# EAGLE board drive_pane (EAGLE 9.6.2), part 1 of 2
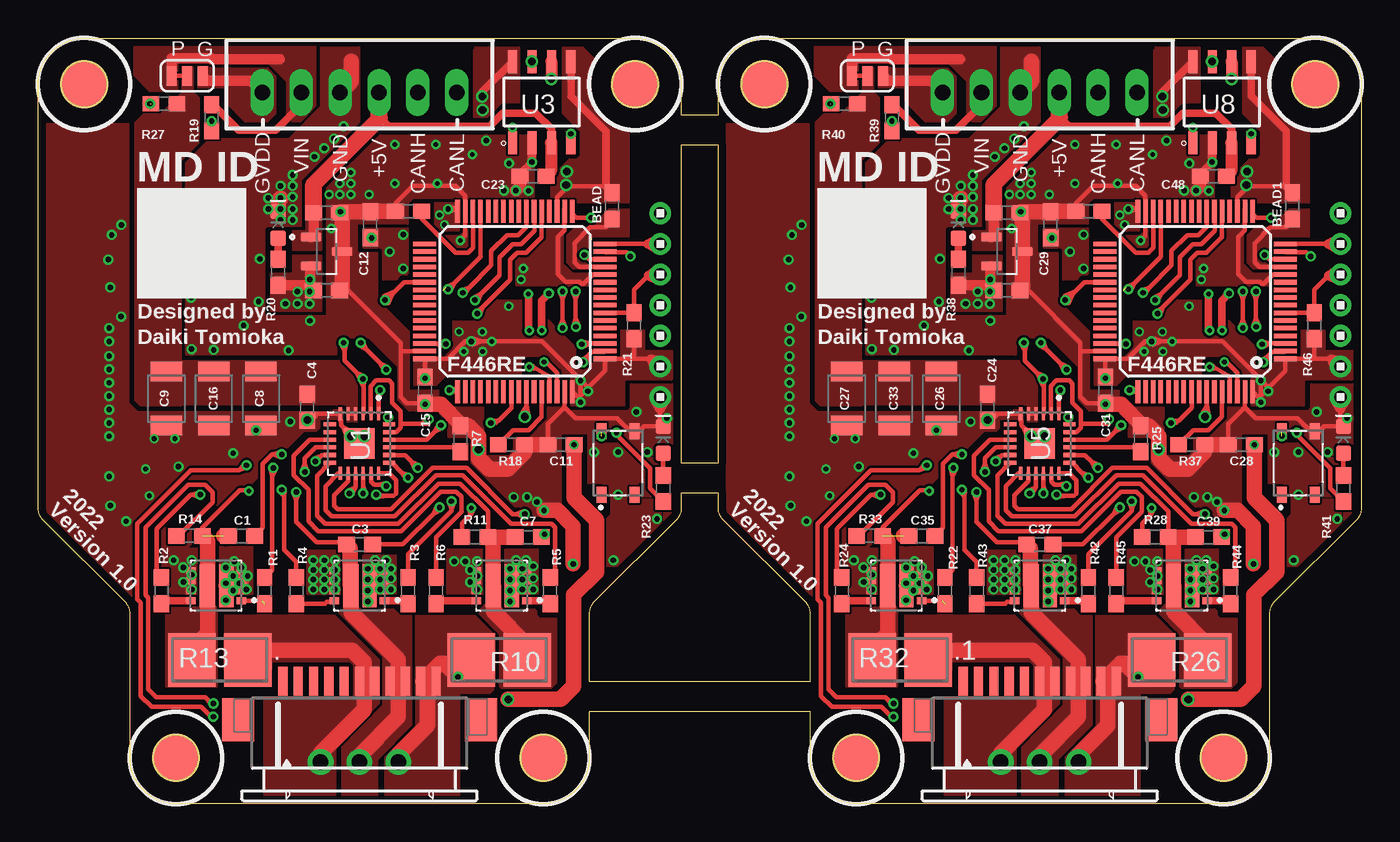
[diagram p0: board, top side]
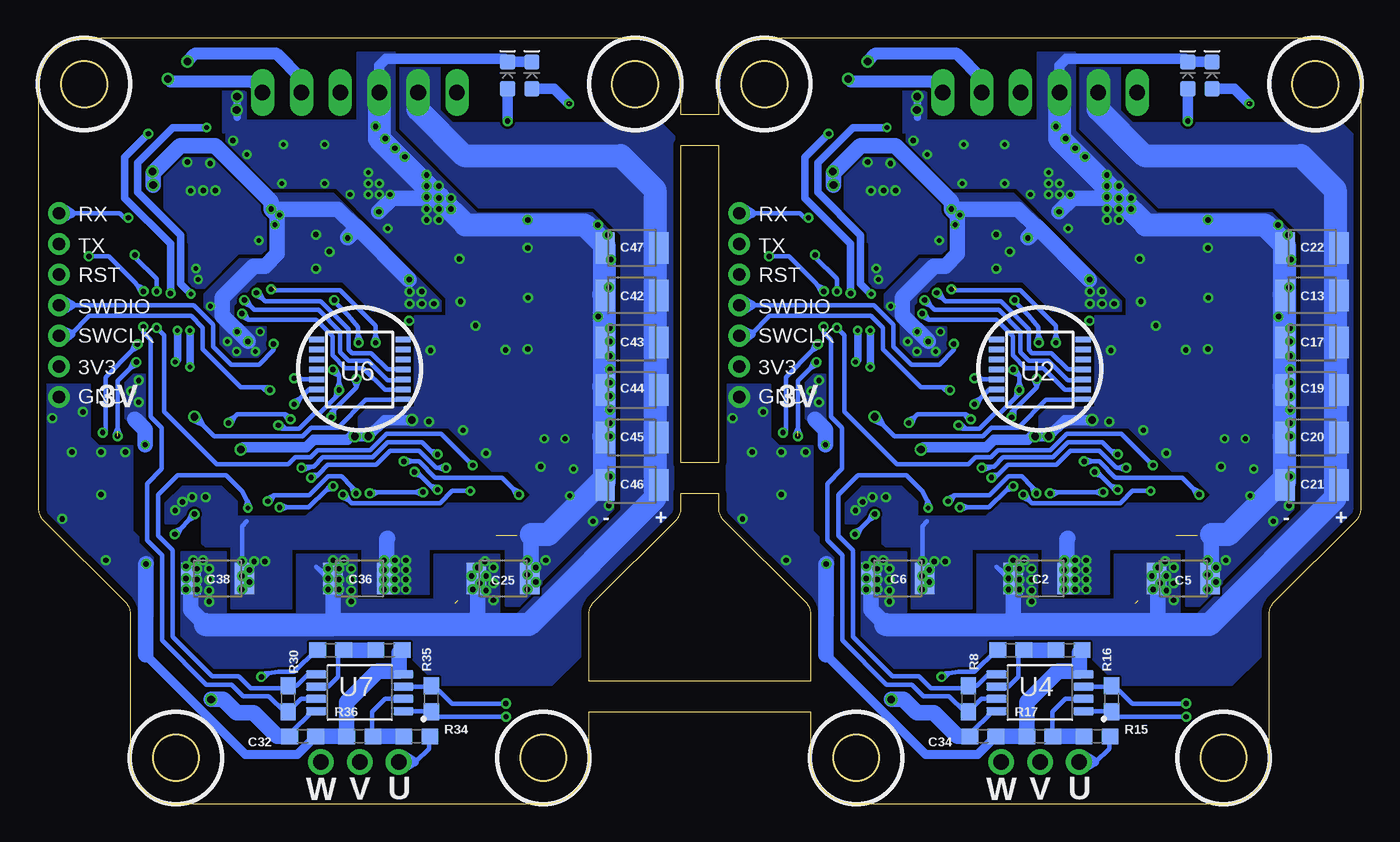
[diagram p1: board, bottom side, seen from below]

Size 86.45 x 50 mm. Coordinates in mm from the lower left corner, seen from the top.
Outline: 42,45 44.45,45 44.45,47 arc-90 47.45,50 83.45,50 arc-90 86.45,47 86.45,19.27 arc-45 86.16,18.56 80.74,13.15 arc45 80.45,12.44 80.45,3 arc-90 77.45,0 53.45,0 arc-90 50.45,3 50.45,6 36,6 36,3 arc-90 33,0 9,0 arc-90 6,3 6,12.44 arc45 5.71,13.15 0.29,18.56 arc-45 0,19.27 0,47 arc-90 3,50 39,50 arc-90 42,47 42,45
Outline: 42,22.27 44.45,22.27 44.45,43 42,43 42,22.27
Outline: 36,8 50.45,8 50.45,12.44 arc45 50.16,13.15 44.74,18.56 arc-45 44.45,19.27 44.45,20.27 42,20.27 42,19.27 arc-45 41.71,18.56 36.29,13.15 arc45 36,12.44 36,8
Outline: circle at 3,47 radius 1.5
Outline: circle at 39,47 radius 1.5
Outline: circle at 9,3 radius 1.5
Outline: circle at 33,3 radius 1.5
Outline: circle at 83.45,47 radius 1.5
Outline: circle at 53.45,3 radius 1.5
Outline: circle at 77.45,3 radius 1.5
Outline: circle at 47.45,47 radius 1.5
Copper layers (1*16): Top 0.035mm / dielectric 1.6mm / Bottom 0.035mm
Design rules "Elecrow_2-layer_PCB_eagle_rule": minimum track width 6mil, minimum drill 12mil, track to track 6mil, track to pad 6mil, pad to pad 6mil, via to via 8mil, smd to smd 0mil, copper to edge 20mil, drill to drill 10mil, minimum pad ring 6mil, minimum via ring 6mil, stop-mask expansion 0mil, vias tented up to drill 100mil, thermal gap 10mil
tRestrict: area 0,44 to 6,50; area 36,44 to 42,50; area 6,0 to 12,6; area 30,0 to 36,6; area 44.4,44 to 50.4,50; area 80.5,44 to 86.5,50; area 50.4,0 to 56.4,6; area 74.5,0 to 80.5,6; 20 lines
bRestrict: area 0,44 to 6,50; area 36,44 to 42,50; area 44.4,44 to 50.4,50; area 80.5,44 to 86.5,50; 2 lines

## Footprints (pad centres in the part's own frame; a part is rotated, then mirrored left to right if it is on the bottom)
CON-SMT-FFCFPC_52207-1185 = smd 0.6 x 1.9: 1 -5,2.5; 2 -4,2.5; 3 -3,2.5; 4 -2,2.5; 5 -1,2.5; 6 0,2.5; 7 1,2.5; 8 2,2.5; 9 3,2.5; 10 4,2.5; 11 5,2.5 | smd 2.1 x 2.8: P$1 -7.93,-0.03; P$4 7.945,-0.03
0603 = smd 1.1 x 1: 1 -0.85,0; 2 0.85,0
1210 = smd 1.27 x 2.06: 1 -1.755,0; 2 1.755,0
1608 = smd 1.1 x 1: 1 -0.85,0; 2 0.85,0
LED-0603 = smd 1 x 1: A -0.877,0; C 0.877,0
SMT-JUMPER_3_1-NC_TRACE_SILK = smd 0.635 x 1.27: 1 -1.016,0; 2 0,0; 3 1.016,0
1X03-CLEANBIG = drill 1.016 pad 1.676: 1 -2.54,0; 2 0,0; 3 2.54,0
STM32F446RET6 = smd 0.3 x 1.5: BOOT0 -1.75,5.9; PA3 -3.75,-5.9; PA4 -2.25,-5.9; PA5 -1.75,-5.9; PA6 -1.25,-5.9; PA7 -0.75,-5.9; PA14 3.75,5.9; PA15 3.25,5.9; PB0 0.75,-5.9; PB1 1.25,-5.9; PB2 1.75,-5.9; PB3 0.75,5.9; PB4 0.25,5.9; PB5 -0.25,5.9; PB6 -0.75,5.9; PB7 -1.25,5.9; PB8 -2.25,5.9; PB9 -2.75,5.9; PB10 2.25,-5.9; PC4 -0.25,-5.9; PC5 0.25,-5.9; PC10 2.75,5.9; PC11 2.25,5.9; PC12 1.75,5.9; PD2 1.25,5.9; VCAP_1 2.75,-5.9; VDD -2.75,-5.9; VDD1 3.75,-5.9; VDD3 -3.75,5.9; VSS -3.25,-5.9; VSS1 3.25,-5.9; VSS3 -3.25,5.9 | smd 1.5 x 0.3: NRST -5.9,0.75; PA0 -5.9,-2.75; PA1 -5.9,-3.25; PA2 -5.9,-3.75; PA8 5.9,0.25; PA9 5.9,0.75; PA10 5.9,1.25; PA11 5.9,1.75; PA12 5.9,2.25; PA13 5.9,2.75; PB12 5.9,-3.75; PB13 5.9,-3.25; PB14 5.9,-2.75; PB15 5.9,-2.25; PC0 -5.9,0.25; PC1 -5.9,-0.25; PC2 -5.9,-0.75; PC3 -5.9,-1.25; PC6 5.9,-1.75; PC7 5.9,-1.25; PC8 5.9,-0.75; PC9 5.9,-0.25; PC13 -5.9,3.25; PC14 -5.9,2.75; PC15 -5.9,2.25; PH0 -5.9,1.75; PH1 -5.9,1.25; VBAT -5.9,3.75; VDD2 5.9,3.75; VREF+ -5.9,-2.25; VREF- -5.9,-1.75; VSS2 5.9,3.25
TRANS_SIZ240DT-T1-GE3 = smd 0.62 x 0.44: 1 -1.64,0.975; 2 -1.64,0.325; 3 -1.64,-0.325; 4 -1.64,-0.975; 5 1.64,-0.975; 6 1.64,-0.325; 7 1.64,0.325; 8 1.64,0.975 | smd 1.005 x 2.8: 9 0.557,0 | smd 0.935 x 2.8: 10 -0.662,0
SMS-REF = smd 3.1 x 3.5: 1 1.829,0; 2 -1.829,0
R0603 = smd 1.1 x 1: 1 -0.85,0; 2 0.85,0
SOT95P237X112-3N = smd 1.32 x 0.59: 1 -1.015,0.95; 2 -1.015,-0.95; 3 1.015,0
SW_SKRPACE010 = smd 1.05 x 0.65: 1 -2.075,1.075; 2 2.075,1.075; 3 -2.075,-1.075; 4 2.075,-1.075
QFN50P400X400X100-25N = smd 0.27 x 0.86: BSTA 0.75,1.935; DT 0.25,1.935; GHA 1.25,1.935; GLA 0.75,-1.935; GLB 0.25,-1.935; GLC -0.25,-1.935; INHA -0.25,1.935; INHB -0.75,1.935; INHC -1.25,1.935; NC1 -1.25,-1.935; NC2 -0.75,-1.935; SHC 1.25,-1.935 | smd 0.86 x 0.27: BSTB 1.935,0.75; BSTC 1.935,-0.75; GHB 1.935,0.25; GHC 1.935,-1.25; GND -1.935,-1.25; GVDD -1.935,-0.25; INLA -1.935,1.25; INLB -1.935,0.75; INLC -1.935,0.25; MODE -1.935,-0.75; SHA 1.935,1.25; SHB 1.935,-0.25 | smd 2 x 2: PAD 0,0
SOP65P640X120-14N = smd 1 x 0.35: 1 -2.825,1.95; 2 -2.825,1.3; 3 -2.825,0.65; 4 -2.825,0; 5 -2.825,-0.65; 6 -2.825,-1.3; 7 -2.825,-1.95; 8 2.825,-1.95; 9 2.825,-1.3; 10 2.825,-0.65; 11 2.825,0; 12 2.825,0.65; 13 2.825,1.3; 14 2.825,1.95
SOIC127P600X175-8N = smd 1.5 x 0.6: 1 -2.65,1.905; 2 -2.65,0.635; 3 -2.65,-0.635; 4 -2.65,-1.905; 5 2.65,-1.905; 6 2.65,-0.635; 7 2.65,0.635; 8 2.65,1.905
SOP80P620X125-8N = smd 1.31 x 0.52: 1 -2.85,1.2; 2 -2.85,0.4; 3 -2.85,-0.4; 4 -2.85,-1.2; 5 2.85,-1.2; 6 2.85,-0.4; 7 2.85,0.4; 8 2.85,1.2
3MM = smd 3 x 3: P$1 0,0
1X7 = drill 0.8 pad 1.422: 1 -6,0; 2 -4,0; 3 -2,0; 4 0,0; 5 2,0; 6 4,0; 7 6,0
JST-XH-06-PACKAGE-LONG-PAD = drill 1.016 long: 1 -6.35,0; 2 -3.81,0; 3 -1.27,0; 4 1.27,0; 5 3.81,0; 6 6.35,0

## Placement (x,y rotation side)
.  FFC12_11PIN_1MM  [CON-SMT-FFCFPC_52207-1185]  20.99,5.51 0 top
.1  FFC12_11PIN_1MM  [CON-SMT-FFCFPC_52207-1185]  65.44,5.51 0 top
BEAD  0  [0603]  37.49,39.05 90 top
BEAD1  0  [0603]  81.94,39.05 90 top
C1  0.1uF  [0603]  13.29,17.49 180 top
C2  22UF-1210  [1210]  20.99,14.72 180 bottom
C3  0.1uF  [0603]  20.99,16.94 180 top
C4  0.1uF  [0603]  17.58,25.91 270 top
C5  22UF-1210  [1210]  11.62,14.72 180 bottom
C6  22UF-1210  [1210]  30.28,14.72 180 bottom
C7  0.1uF  [0603]  32.02,17.41 180 top
C8  22UF-1210  [1210]  14.56,26.46 90 top
C9  22UF-1210  [1210]  8.37,26.46 90 top
C10  0.1UF  [1608]  18.85,33.53 0 top
C11  0.1uF  [0603]  34.17,23.45 180 top
C12  0.1uF  [0603]  21.7,37.81 90 top
C13  22UF-1210  [1210]  3.21,33.21 0 bottom
C14  4.7uF  [0603]  24.2,38.7 180 top
C15  0.1uF  [0603]  25.28,27.02 270 top
C16  22UF-1210  [1210]  11.46,26.46 90 top
C17  22UF-1210  [1210]  3.21,30.11 0 bottom
C18  0.1UF  [1608]  18.85,38.61 0 top
C19  22UF-1210  [1210]  3.21,27.02 0 bottom
C20  22UF-1210  [1210]  3.21,23.92 0 bottom
C21  22UF-1210  [1210]  3.21,20.83 0 bottom
C22  22UF-1210  [1210]  3.21,36.31 0 bottom
C23  0.1uF  [0603]  32.34,40.99 180 top
C24  0.1uF  [0603]  62.03,25.91 270 top
C25  22UF-1210  [1210]  56.07,14.72 180 bottom
C26  22UF-1210  [1210]  59.01,26.46 90 top
C27  22UF-1210  [1210]  52.82,26.46 90 top
C28  0.1uF  [0603]  78.62,23.45 180 top
C29  0.1uF  [0603]  66.15,37.81 90 top
C30  4.7uF  [0603]  68.65,38.7 180 top
C31  0.1uF  [0603]  69.73,27.02 270 top
C32  0.1uF  [0603]  69.17,4.4 0 bottom
C33  22UF-1210  [1210]  55.91,26.46 90 top
C34  0.1uF  [0603]  24.72,4.4 0 bottom
C35  0.1uF  [0603]  57.74,17.49 180 top
C36  22UF-1210  [1210]  65.44,14.72 180 bottom
C37  0.1uF  [0603]  65.44,16.94 180 top
C38  22UF-1210  [1210]  74.73,14.72 180 bottom
C39  0.1uF  [0603]  76.47,17.41 180 top
C40  0.1UF  [1608]  63.3,38.61 0 top
C41  0.1UF  [1608]  63.3,33.53 0 top
C42  22UF-1210  [1210]  47.66,33.21 0 bottom
C43  22UF-1210  [1210]  47.66,30.11 0 bottom
C44  22UF-1210  [1210]  47.66,27.02 0 bottom
C45  22UF-1210  [1210]  47.66,23.92 0 bottom
C46  22UF-1210  [1210]  47.66,20.83 0 bottom
C47  22UF-1210  [1210]  47.66,36.31 0 bottom
C48  0.1uF  [0603]  76.79,40.99 180 top
D1  WHITE  [LED-0603]  11.33,47.58 90 bottom
D2  RED  [LED-0603]  9.75,47.58 90 bottom
D3  WHITE  [LED-0603]  15.67,37.81 90 top
D4  WHITE  [LED-0603]  55.78,47.58 90 bottom
D5  RED  [LED-0603]  54.2,47.58 90 bottom
D6  WHITE  [LED-0603]  40.83,23.77 90 top
D7  WHITE  [LED-0603]  85.28,23.77 90 top
D8  WHITE  [LED-0603]  60.12,37.81 90 top
JP1  JUMPER-SMT_3_1-NC_TRACE_SILK  [SMT-JUMPER_3_1-NC_TRACE_SILK]  54.18,47.54 180 top
JP2  JUMPER-SMT_3_1-NC_TRACE_SILK  [SMT-JUMPER_3_1-NC_TRACE_SILK]  9.73,47.54 180 top
JP3  [1X03-CLEANBIG]  20.99,2.73 0 top
JP4  [1X03-CLEANBIG]  65.44,2.73 0 top
NUCLEO_MAIN  F446RET6  [STM32F446RET6]  31.15,32.81 180 top
NUCLEO_MAIN1  F446RET6  [STM32F446RET6]  75.6,32.81 180 top
Q1  SIZ240DT-T1-GE3  [TRANS_SIZ240DT-T1-GE3]  56.07,14.24 180 top
Q2  SIZ240DT-T1-GE3  [TRANS_SIZ240DT-T1-GE3]  11.62,14.24 180 top
Q3  SIZ240DT-T1-GE3  [TRANS_SIZ240DT-T1-GE3]  20.99,14.24 180 top
Q4  SIZ240DT-T1-GE3  [TRANS_SIZ240DT-T1-GE3]  30.28,14.24 180 top
Q5  SIZ240DT-T1-GE3  [TRANS_SIZ240DT-T1-GE3]  65.44,14.24 180 top
Q6  SIZ240DT-T1-GE3  [TRANS_SIZ240DT-T1-GE3]  74.73,14.24 180 top
R1  50  [0603]  14.8,13.92 270 top
R2  50  [0603]  8.05,13.92 270 top
R3  50  [0603]  24.16,13.92 270 top
R4  50  [0603]  16.86,13.92 270 top
R5  50  [0603]  33.45,13.92 270 top
R6  50  [0603]  25.99,13.92 270 top
R7  50k  [0603]  27.58,23.84 270 top
R8  33k  [0603]  25.67,6.86 90 bottom
R9  33k  [0603]  19.08,10.03 180 bottom
R10  [SMS-REF]  30.12,9.4 180 top
R11  1k  [0603]  28.53,17.41 0 top
R12  1k  [0603]  22.89,10.03 180 bottom
R13  [SMS-REF]  11.86,9.4 0 top
R14  1k  [0603]  9.88,17.49 0 top
R15  1k  [0603]  17.26,4.4 0 bottom
R16  33k  [0603]  16.31,6.86 90 bottom
R17  33k  [0603]  20.99,4.4 0 bottom
R18  10k  [R0603]  30.91,23.45 180 top
R19  10k  [0603]  11.33,44.8 90 top
R20  1k  [R0603]  15.67,34.72 270 top
R21  10k  [R0603]  38.93,31.23 90 top
R22  50  [0603]  59.25,13.92 270 top
R23  1k  [0603]  40.83,20.59 270 top
R24  50  [0603]  52.5,13.92 270 top
R25  50k  [0603]  72.03,23.84 270 top
R26  [SMS-REF]  74.57,9.4 180 top
R27  8k  [0603]  8.21,45.72 0 top
R28  1k  [0603]  72.98,17.41 0 top
R29  1k  [0603]  67.34,10.03 180 bottom
R30  33k  [0603]  70.12,6.86 90 bottom
R31  33k  [0603]  63.54,10.03 180 bottom
R32  [SMS-REF]  56.31,9.4 0 top
R33  1k  [0603]  54.33,17.49 0 top
R34  1k  [0603]  61.71,4.4 0 bottom
R35  33k  [0603]  60.76,6.86 90 bottom
R36  33k  [0603]  65.44,4.4 0 bottom
R37  10k  [R0603]  75.36,23.45 180 top
R38  1k  [R0603]  60.12,34.72 270 top
R39  10k  [0603]  55.78,44.8 90 top
R40  8k  [0603]  52.66,45.72 0 top
R41  1k  [0603]  85.28,20.59 270 top
R42  50  [0603]  68.62,13.92 270 top
R43  50  [0603]  61.31,13.92 270 top
R44  50  [0603]  77.9,13.92 270 top
R45  50  [0603]  70.44,13.92 270 top
R46  10k  [R0603]  83.38,31.23 90 top
REG  AP7333  [SOT95P237X112-3N]  18.85,36.07 0 top
REG1  AP7333  [SOT95P237X112-3N]  63.3,36.07 0 top
S1  SKRPACE010  [SW_SKRPACE010]  37.9,22.26 90 top
S2  SKRPACE010  [SW_SKRPACE010]  82.35,22.26 90 top
U1  QFN50P400X400X100-25NDRV8300DRGER  [QFN50P400X400X100-25N]  20.99,23.53 270 top
U2  AS5048A-HTSP-500  [SOP65P640X120-14N]  20.99,28.37 180 bottom
U3  MCP2562-E/SN  [SOIC127P600X175-8N]  32.9,45.83 90 top
U4  SOP80P620X125-8N  [SOP80P620X125-8N]  20.99,7.26 180 bottom
U5  QFN50P400X400X100-25NDRV8300DRGER  [QFN50P400X400X100-25N]  65.44,23.53 270 top
U6  AS5048A-HTSP-500  [SOP65P640X120-14N]  65.44,28.37 180 bottom
U7  SOP80P620X125-8N  [SOP80P620X125-8N]  65.44,7.26 180 bottom
U8  MCP2562-E/SN  [SOIC127P600X175-8N]  77.35,45.83 90 top
U$1  PIN  [3MM]  39,47 0 top
U$2  1X7  [1X7]  40.64,32.57 90 top
U$3  PIN  [3MM]  3,47 0 top
U$4  PIN  [3MM]  9,3 0 top
U$5  PIN  [3MM]  33,3 0 top
U$6  1X7  [1X7]  85.09,32.57 90 top
U$7  PIN  [3MM]  83.45,47 0 top
U$8  PIN  [3MM]  47.45,47 0 top
U$9  PIN  [3MM]  53.45,3 0 top
U$10  PIN  [3MM]  77.45,3 0 top
X1  JST-XH-06-PIN-LONG-PAD  [JST-XH-06-PACKAGE-LONG-PAD]  65.44,46.47 0 top
X2  JST-XH-06-PIN-LONG-PAD  [JST-XH-06-PACKAGE-LONG-PAD]  20.99,46.47 0 top

## Library data of the parts
. .1 = MotorDriver_FourthEdition_prot
BEAD BEAD1 = SparkFun-Resistors; PROD_ID: RES-08609
C1 C3 C7 C35 C37 C39 = SparkFun-Capacitors; PROD_ID: CAP-08604
C2 C5 C6 C8 C9 C13 C16 C17 C19-C22 C25-C27 C33 C36 C38 C42-C47 = SparkFun-Capacitors
C4 C11 C12 C23 C24 C28 C29 C48 = SparkFun-Capacitors; PROD_ID: CAP-08390
C10 C18 C40 C41 = Custom_Designed_By_Yusei
C14 C15 C30-C32 C34 = SparkFun-Capacitors; PROD_ID: CAP-00810
D1 D3 D4 D6-D8 = SparkFun-LED; PROD_ID: DIO-09004
D2 D5 = SparkFun-LED; PROD_ID: DIO-00819
JP1 JP2 = SparkFun-Jumpers
JP3 JP4 = adafruit
NUCLEO_MAIN NUCLEO_MAIN1 = STM32F446RET6
Q1-Q6 = SIZ240DT-T1-GE3; AVAILABILITY: In Stock; DESCRIPTION: Mosfet Array 2 N-Channel (Dual) 40V 17.2A (Ta), 48A (Tc), 16.9A (Ta), 47A (Tc) 4.3W (Ta), 33W (Tc) Surface Mount 8-PowerPair® (3.3x3.3); MF: Vishay Siliconix; MP: SIZ240DT-T1-GE3; PACKAGE: PowerWDFN-8 Vishay Siliconix; PRICE: None; PURCHASE-URL: https://pricing.snapeda.com/search/part/SIZ240DT-T1-GE3/?ref=eda
R1-R9 R11 R12 R14-R17 R22 R24 R25 R28-R31 R33-R36 R42-R45 = SparkFun-Resistors; PROD_ID: RES-07856
R10 R13 R26 R32 = resistor-shunt; OC_FARNELL: unknown; OC_NEWARK: unknown
R18 R20 R21 R37 R38 R46 = Custom_Designed_By_Yusei; PROD_ID: RES-07856
R19 R23 R27 R39-R41 = SparkFun-Resistors; PROD_ID: RES-08296
REG REG1 = SOT95P237X112-3N
S1 S2 = Alps SW; AVAILABILITY: Good; DESCRIPTION: Switch Tactile N.O. SPST Button J-Bend 0.05A 16VDC 2.55N SMD Automotive T/R; MF: ALPS; MP: SKRPACE010; PACKAGE: None; PRICE: 0.29 USD
U1 U5 = DRV8300DRGER
U2 U6 = AS5048A-HTSP-500; AVAILABILITY: In Stock; DESCRIPTION: Hall Effect Sensor Angle External Magnet, Not Included Gull Wing; MF: ams; MP: AS5048A-HTSP-500; PACKAGE: TSSOP-14 ams; PRICE: None; PURCHASE-URL: https://pricing.snapeda.com/search/part/AS5048A-HTSP-500/?ref=eda
U3 U8 = MCP2562-E_SN; AVAILABILITY: In Stock; DESCRIPTION: 1/1 Transceiver Half CANbus 8-SOIC; MF: Microchip; MP: MCP2562-E/SN; PACKAGE: SO-8 Microchip; PRICE: None; PURCHASE-URL: https://pricing.snapeda.com/search/part/MCP2562-E/SN/?ref=eda
U4 U7 = NJM2732; A1_MIN: 0.0; A_MAX: 1.25; A_MIN: 1.25; A_NOM: 1.25; B_MAX: 0.35; B_MIN: 0.35; B_NOM: 0.35; D2_MAX: 0.0; D_MAX: 3.5; D_MIN: 3.5; D_NOM: 3.5; E1_MAX: 4.2; E1_MIN: 4.2; E1_NOM: 4.2; E2_MAX: 0.0; ENOM: 0.8; E_MAX: 6.2; E_MIN: 6.2; E_NOM: 6.2; L_MAX: 0.5; L_MIN: 0.5; L_NOM: 0.5; MANUFACTURER: New Japan Radio; PIN_COUNT: 8.0; SNAPEDA_PACKAGE_ID: 11524; STANDARD: IPC 7351B
U$1 U$3-U$5 U$7-U$10 = pin
U$2 U$6 = headers(2mm)
X1 X2 = Rembrandt Electronics - JST XH Connectors v1-0

## Nets
3V1: BEAD1.2 C28.1 C29.1 C31.1 C32.1 C41.1 NUCLEO_MAIN1.VBAT NUCLEO_MAIN1.VDD NUCLEO_MAIN1.VDD1 NUCLEO_MAIN1.VDD2 NUCLEO_MAIN1.VDD3 R38.2 R46.1 REG1.2 U6.12 U7.8 U8.5 U$6.2
3V3: BEAD.2 C10.1 C11.1 C12.1 C15.1 C34.1 NUCLEO_MAIN.VBAT NUCLEO_MAIN.VDD NUCLEO_MAIN.VDD1 NUCLEO_MAIN.VDD2 NUCLEO_MAIN.VDD3 R20.2 R21.1 REG.2 U2.12 U3.5 U4.8 U$2.2
5V: C18.1 C23.1 REG.1 U3.3 X2.4
5V1: C40.1 C48.1 REG1.1 U8.3 X1.4
BOOT0: NUCLEO_MAIN.BOOT0 R18.2
BOOT1: NUCLEO_MAIN1.BOOT0 R37.2
BSTA: C1.1 U1.BSTA
BSTA1: C35.1 U5.BSTA
BSTB: C3.1 U1.BSTB
BSTB1: C37.1 U5.BSTB
BSTC: C7.1 U1.BSTC
BSTC1: C39.1 U5.BSTC
C_U: NUCLEO_MAIN.PA0 R16.1 U4.1
C_U1: NUCLEO_MAIN1.PA0 R35.1 U7.1
C_W: NUCLEO_MAIN.PA1 R8.1 U4.7
C_W1: NUCLEO_MAIN1.PA1 R30.1 U7.7
CANH: U3.7 X2.5
CANH1: U8.7 X1.5
CANL: U3.6 X2.6
CANL1: U8.6 X1.6
CANRX: NUCLEO_MAIN.PB9 U3.4
CANRX1: NUCLEO_MAIN1.PB9 U8.4
CANTX: NUCLEO_MAIN.PB8 U3.1
CANTX1: NUCLEO_MAIN1.PB8 U8.1
CLK: NUCLEO_MAIN.PA5 U2.2
CLK1: NUCLEO_MAIN1.PA5 U6.2
CS: NUCLEO_MAIN.PB6 U2.1
CS1: NUCLEO_MAIN1.PB6 U6.1
DT: R7.2 U1.DT
DT1: R25.2 U5.DT
GHA: R1.1 U1.GHA
GHA1: R22.1 U5.GHA
GHB: R3.1 U1.GHB
GHB1: R42.1 U5.GHB
GHC: R5.1 U1.GHC
GHC1: R44.1 U5.GHC
GLA: R2.1 U1.GLA
GLA1: R24.1 U5.GLA
GLB: R4.1 U1.GLB
GLB1: R43.1 U5.GLB
GLC: R6.1 U1.GLC
GLC1: R45.1 U5.GLC
GND: C2.1 C4.2 C5.1 C6.1 C8.1 C9.1 C10.2 C11.2 C12.2 C13.1 C14.2 C15.2 C16.1 C17.1 C18.2 C19.1 C20.1 C21.1 C22.1 C23.2 C34.2 D1.C D2.C D3.C D6.C NUCLEO_MAIN.VREF- NUCLEO_MAIN.VSS NUCLEO_MAIN.VSS1 NUCLEO_MAIN.VSS2 NUCLEO_MAIN.VSS3 Q2.5 Q2.6 Q2.7 Q3.5 Q3.6 Q3.7 Q4.5 Q4.6 Q4.7 R7.1 R9.1 R17.1 R18.1 REG.3 S1.4 U1.GND U1.PAD U2.13 U3.2 U3.8 U4.4 U$2.1 X2.3
GND1: C24.2 C25.1 C26.1 C27.1 C28.2 C29.2 C30.2 C31.2 C32.2 C33.1 C36.1 C38.1 C40.2 C41.2 C42.1 C43.1 C44.1 C45.1 C46.1 C47.1 C48.2 D4.C D5.C D7.C D8.C NUCLEO_MAIN1.VREF- NUCLEO_MAIN1.VSS NUCLEO_MAIN1.VSS1 NUCLEO_MAIN1.VSS2 NUCLEO_MAIN1.VSS3 Q1.5 Q1.6 Q1.7 Q5.5 Q5.6 Q5.7 Q6.5 Q6.6 Q6.7 R25.1 R31.1 R36.1 R37.1 REG1.3 S2.4 U5.GND U5.PAD U6.13 U7.4 U8.2 U8.8 U$6.1 X1.3
GVDD: C4.1 C8.2 C9.2 C16.2 JP2.2 R27.2 U1.GVDD U1.MODE
GVDD1: C24.1 C26.2 C27.2 C33.2 JP1.2 R40.2 U5.GVDD U5.MODE
GVDD_IN: JP2.1 X2.1
GVDD_IN1: JP1.1 X1.1
HA: Q2.1 R1.2
HA1: Q1.1 R22.2
HB: Q3.1 R3.2
HB1: Q5.1 R42.2
HC: Q4.1 R5.2
HC1: Q6.1 R44.2
INA: NUCLEO_MAIN.PC7 U1.INHA U1.INLA
INA1: NUCLEO_MAIN1.PC7 U5.INHA U5.INLA
INB: NUCLEO_MAIN.PB4 U1.INHB U1.INLB
INB1: NUCLEO_MAIN1.PB4 U5.INHB U5.INLB
INC: NUCLEO_MAIN.PB10 U1.INHC U1.INLC
INC1: NUCLEO_MAIN1.PB10 U5.INHC U5.INLC
L: D3.A R20.1
L1: D8.A R38.1
LA: Q2.8 R2.2
LA1: Q1.8 R24.2
LB: Q3.8 R4.2
LB1: Q5.8 R43.2
LC: Q4.8 R6.2
LC1: Q6.8 R45.2
LED: NUCLEO_MAIN.PC14 R23.2
LED1: NUCLEO_MAIN1.PC14 R41.2
MISO: NUCLEO_MAIN.PA6 U2.3
MISO1: NUCLEO_MAIN1.PA6 U6.3
MOSI: NUCLEO_MAIN.PA7 U2.4
MOSI1: NUCLEO_MAIN1.PA7 U6.4
N$1: R28.1 R30.2 U7.5
N$2: R29.1 R31.2 U7.6
N$3: R33.1 R35.2 U7.3
N$4: R34.1 R36.2 U7.2
N$5: D4.A R39.1
N$6: D5.A R40.1
N$7: D7.A R41.1
N$8: R8.2 R11.1 U4.5
N$9: R9.2 R12.1 U4.6
N$10: R14.1 R16.2 U4.3
N$11: R15.1 R17.2 U4.2
N$14: D1.A R19.1
N$15: D2.A R27.1
N$21: D6.A R23.1
NRST: NUCLEO_MAIN.NRST R21.2 U$2.5
NRST1: NUCLEO_MAIN1.NRST R46.2 U$6.5
PVDD: C2.2 C5.2 C6.2 C13.2 C17.2 C19.2 C20.2 C21.2 C22.2 JP2.3 Q2.2 Q2.3 Q2.4 Q2.10 Q3.2 Q3.3 Q3.4 Q3.10 Q4.2 Q4.3 Q4.4 Q4.10 R19.2 X2.2
PVDD1: C25.2 C36.2 C38.2 C42.2 C43.2 C44.2 C45.2 C46.2 C47.2 JP1.3 Q1.2 Q1.3 Q1.4 Q1.10 Q5.2 Q5.3 Q5.4 Q5.10 Q6.2 Q6.3 Q6.4 Q6.10 R39.2 X1.2
SW: NUCLEO_MAIN.PC13 S1.2
SW1: NUCLEO_MAIN1.PC13 S2.2
SWCLK: NUCLEO_MAIN.PA14 U$2.3
SWCLK1: NUCLEO_MAIN1.PA14 U$6.3
SWDIO: NUCLEO_MAIN.PA13 U$2.4
SWDIO1: NUCLEO_MAIN1.PA13 U$6.4
U: C1.2 Q2.9 R13.2 R14.2 U1.SHA
U1: C35.2 Q1.9 R32.2 R33.2 U5.SHA
U_CS: ..6 ..7 JP3.1 R13.1 R15.2
U_CS1: .1.6 .1.7 JP4.1 R32.1 R34.2
USBRX: NUCLEO_MAIN.PA3 U$2.7
USBRX1: NUCLEO_MAIN1.PA3 U$6.7
USBTX: NUCLEO_MAIN.PA2 U$2.6
USBTX1: NUCLEO_MAIN1.PA2 U$6.6
V: ..8 ..9 C3.2 JP3.2 Q3.9 U1.SHB
V1: .1.8 .1.9 C37.2 JP4.2 Q5.9 U5.SHB
VCAP: C14.1 NUCLEO_MAIN.VCAP_1
VCAP1: C30.1 NUCLEO_MAIN1.VCAP_1
VDD5V: U2.11
VDD5V1: U6.11
VDDA: BEAD.1 NUCLEO_MAIN.VREF+
VDDA1: BEAD1.1 NUCLEO_MAIN1.VREF+
W: C7.2 Q4.9 R10.2 R11.2 U1.SHC
W1: C39.2 Q6.9 R26.2 R28.2 U5.SHC
W_CS: ..10 ..11 JP3.3 R10.1 R12.2
W_CS1: .1.10 .1.11 JP4.3 R26.1 R29.2

## Tracks (layer width: path | path; a pad name or v marks a point on that pad's centre or on a via)
3V1  (via drill 0.3, 0.35, 0.5)
  Top 0.3: 83.38,29.06 NUCLEO_MAIN1.VBAT 81.5,28.27 80.39,27.16 | 83.38,29.06 84.47,29.06 84.6,29.06 U$6.2 | R46.1 83.38,29.06 | NUCLEO_MAIN1.VDD1 71.85,38.85 71.76,38.85 | 71.76,38.85 v71.23,38.85 | 69.73,28.32 69.73,29.04 NUCLEO_MAIN1.VDD2 71.22,29.06 72.35,30.19 72.38,30.19 | 69.73,28.32 C31.1 | 79.85,26.62 80.39,27.16 | v72.74,30.19 73.43,30.19 | 73.43,30.19 v74.09,30.19 77.37,30.19 80,27.57 80.39,27.18 80.39,27.16 | 79.35,26.83 NUCLEO_MAIN1.VDD3 79.65,26.62 79.85,26.62 | 72.38,30.19 v72.74,30.19 | 66.35,37 C29.1 | 71.76,38.85 71.29,39.01 v71.23,38.85 | 71.76,38.85 71.29,38.68 v71.23,38.85 | 66.28,36.9 66.23,36.91 v66.23,36.96 66.15,36.88 66.15,36.65 66.15,36.64 | 69.73,28.32 69.56,27.85 v69.73,27.79 69.89,27.85 69.73,28.32 | 73.43,30.19 72.82,30.41 v72.74,30.19 | 73.43,30.19 72.82,29.98 v72.74,30.19 | 72.38,30.19 72.7,30.08 v72.74,30.19 | 72.38,30.19 72.7,30.31 v72.74,30.19 | v79.89,27.65 79.89,26.62 79.85,26.62 | NUCLEO_MAIN1.VDD 78.35,39.61 79.06,40.32 81.52,40.32
  Top 0.5: U8.5 79.25,46.23 81.55,43.93 81.55,40.29 | 81.52,40.32 81.55,40.29 | 81.55,40.29 BEAD1.2
  Top 0.6: 84.47,29.06 84.71,28.42 U$6.2 85.15,28.97 84.47,29.06
  Top 0.7: REG1.2 62.2,35.04 v62.2,34.24 62.2,33.77 C41.1 62.11,33.87 R38.2
  Top 1: v75.16,6.81 78.57,6.81 79.44,7.68 79.44,13.64 80.92,15.11 80.92,18.53 79.47,19.98 C28.1
  Bottom 0.3: U7.8 68.52,6.05 70.02,4.56 C32.1 | v71.23,38.85 71.21,38.87 | U6.12 69.21,27.72 | 69.21,27.72 69.66,27.72 v69.73,27.79 | 66.6,37 v66.23,36.96 | v66.23,36.96 66.28,37.13 | v66.23,36.96 66.31,36.8 | 69.21,27.72 69.69,27.62 v69.73,27.79 | 69.21,27.72 69.64,27.95 v69.73,27.79
  Bottom 1: C32.1 70.84,4.4 72.38,5.94 73.49,5.94 74.36,6.81 v75.16,6.81 | v62.2,34.24 65.69,37.73 65.69,37.65 | 65.69,37.65 66.89,38.85 v71.23,38.85 | v71.23,38.85 71.23,39.32 74.89,42.97 77.19,42.97 78.94,41.22 v78.94,40.41 | v71.23,38.85 70.84,38.45 70.84,35.91 71.62,35.12 72.37,35.12 74.44,33.06 74.44,31.89 v72.74,30.19 | v66.23,36.96 65.69,37.51 65.69,37.65 | C28.1 79.47,24.43 80.15,25.12
  other vias: 79.47,23.45 79.89,26.23 80.36,26.94 70.68,38.45 71,37.81 71.95,30.83 73.46,30.83 62.19,33.45 62.19,32.66 61.39,32.66 60.6,32.66 61.39,33.45 72.27,29.54 73.49,29.54 75.2,32.5 68.3,34.96 68.3,37.18 67.42,36.07 79,41.3
  pour Top (no thermals): 79.25,27.65 79.57,27.65 80.6,28.69 80.76,28.84 80.76,29.16 82.74,29.16 82.74,25.99 79.25,25.99
  pour Bottom (no thermals): 79.49,28.05 80.2,28.05 80.76,27.5 80.76,25.27 80.76,25.19 80.05,24.48 79.49,24.48 79.41,24.56 79.41,27.97
  pour Top (no thermals): 70.36,39.24 71.95,39.24 71.95,37.42 70.84,37.42 70.36,37.89
  pour Top (no thermals): 69.01,29.16 69.01,27.34 70.44,27.34 71.16,28.05 76,28.05 76,28.92 76.31,29.24 77.66,29.24 78.7,28.21 78.7,28.13 78.85,27.97 79.17,27.97 79.25,27.89 79.25,27.1 80.68,27.1 80.68,28.37 79.81,28.37 79.57,28.61 79.57,29.8 76.47,32.89 71.55,32.89 71.55,29.72 71,29.16
  pour Bottom (no thermals): 60.12,32.81 60.12,32.18 64.65,32.18 66.55,34.08 72.19,34.08 73.7,32.58 73.7,31.78 73.06,31.15 71.55,31.15 71.55,29.72 72.11,29.16 73.7,29.16 74.57,30.04 74.57,31.38 75.6,32.42 75.6,33.29 73.3,35.59 71.47,35.59 71.23,35.83 71.23,39.88 67.19,39.88
  pour Top (no thermals): 61.07,35.83 62.98,35.83 62.98,32.18 59.65,32.18 59.65,34.64 61.07,34.64
  pour Top (no thermals): 85.84,29.56 85.84,27.73 82.59,27.73 82.59,30.91 84.01,30.91 84.01,29.56
  pour Top (no thermals): 68.62,37.58 65.68,37.58 65.68,36.31 66.87,36.31 66.95,36.23 66.95,34.24 67.82,34.24 68.14,34.56 68.54,34.56 68.62,34.64
  pour Top (no thermals): 79.97,49.48 78.7,49.48 78.7,45.12 79.89,43.93 79.89,42.34 79.65,42.1 79.17,42.1 77.96,40.88 77.96,39.63 79.65,39.63 79.65,39.24 83.06,39.24 83.06,46.39
3V3  (via drill 0.3, 0.35, 0.5)
  Top 0.3: 38.93,29.06 NUCLEO_MAIN.VBAT 37.05,28.27 35.93,27.16 | 38.93,29.06 40.02,29.06 40.15,29.06 U$2.2 | R21.1 38.93,29.06 | NUCLEO_MAIN.VDD1 27.4,38.85 27.31,38.85 | 27.31,38.85 v26.78,38.85 | 25.28,28.32 25.28,29.04 NUCLEO_MAIN.VDD2 26.76,29.06 27.9,30.19 27.93,30.19 | 25.28,28.32 C15.1 | 35.4,26.62 35.93,27.16 | v28.29,30.19 28.98,30.19 | 28.98,30.19 v29.64,30.19 32.92,30.19 35.55,27.57 35.93,27.18 35.93,27.16 | 34.9,26.83 NUCLEO_MAIN.VDD3 35.2,26.62 35.4,26.62 | 27.93,30.19 v28.29,30.19 | 21.9,37 C12.1 | 27.31,38.85 26.84,39.01 v26.78,38.85 | 27.31,38.85 26.84,38.68 v26.78,38.85 | 21.83,36.9 21.78,36.91 v21.78,36.96 21.7,36.88 21.7,36.65 21.7,36.64 | 25.28,28.32 25.11,27.85 v25.28,27.79 25.44,27.85 25.28,28.32 | 28.98,30.19 28.37,30.41 v28.29,30.19 | 28.98,30.19 28.37,29.98 v28.29,30.19 | 27.93,30.19 28.25,30.08 v28.29,30.19 | 27.93,30.19 28.25,30.31 v28.29,30.19 | v35.44,27.65 35.44,26.62 35.4,26.62 | NUCLEO_MAIN.VDD 33.9,39.61 34.61,40.32 37.07,40.32
  Top 0.5: U3.5 34.8,46.23 37.1,43.93 37.1,40.29 | 37.07,40.32 37.1,40.29 | 37.1,40.29 BEAD.2
  Top 0.6: 40.02,29.06 40.26,28.42 U$2.2 40.7,28.97 40.02,29.06
  Top 0.7: REG.2 17.75,35.04 v17.75,34.24 17.75,33.77 C10.1 17.66,33.87 R20.2
  Top 1: v30.7,6.81 34.12,6.81 34.99,7.68 34.99,13.64 36.47,15.11 36.47,18.53 35.02,19.98 C11.1
  Bottom 0.3: U4.8 24.07,6.05 25.57,4.56 C34.1 | v26.78,38.85 26.76,38.87 | U2.12 24.76,27.72 | 24.76,27.72 25.2,27.72 v25.28,27.79 | 22.15,37 v21.78,36.96 | v21.78,36.96 21.83,37.13 | v21.78,36.96 21.85,36.8 | 24.76,27.72 25.24,27.62 v25.28,27.79 | 24.76,27.72 25.19,27.95 v25.28,27.79
  Bottom 1: C34.1 26.39,4.4 27.93,5.94 29.04,5.94 29.91,6.81 v30.7,6.81 | v17.75,34.24 21.24,37.73 21.24,37.65 | 21.24,37.65 22.44,38.85 v26.78,38.85 | v26.78,38.85 26.78,39.32 30.44,42.97 32.74,42.97 34.49,41.22 v34.49,40.41 | v26.78,38.85 26.39,38.45 26.39,35.91 27.17,35.12 27.92,35.12 29.99,33.06 29.99,31.89 v28.29,30.19 | v21.78,36.96 21.24,37.51 21.24,37.65 | C11.1 35.02,24.43 35.7,25.12
  other vias: 35.02,23.45 35.44,26.23 35.91,26.94 26.23,38.45 26.55,37.81 27.5,30.83 29.01,30.83 17.74,33.45 17.74,32.66 16.94,32.66 16.15,32.66 16.94,33.45 27.82,29.54 29.04,29.54 30.75,32.5 23.85,34.96 23.85,37.18 22.97,36.07 34.55,41.3
  pour Top (no thermals): 34.8,27.65 35.12,27.65 36.15,28.69 36.31,28.84 36.31,29.16 38.29,29.16 38.29,25.99 34.8,25.99
  pour Bottom (no thermals): 35.04,28.05 35.75,28.05 36.31,27.5 36.31,25.27 36.31,25.19 35.59,24.48 35.04,24.48 34.96,24.56 34.96,27.97
  pour Top (no thermals): 25.91,39.24 27.5,39.24 27.5,37.42 26.39,37.42 25.91,37.89
  pour Top (no thermals): 24.56,29.16 24.56,27.34 25.99,27.34 26.7,28.05 31.55,28.05 31.55,28.92 31.86,29.24 33.21,29.24 34.25,28.21 34.25,28.13 34.4,27.97 34.72,27.97 34.8,27.89 34.8,27.1 36.23,27.1 36.23,28.37 35.36,28.37 35.12,28.61 35.12,29.8 32.02,32.89 27.1,32.89 27.1,29.72 26.55,29.16
  pour Bottom (no thermals): 15.67,32.81 15.67,32.18 20.2,32.18 22.1,34.08 27.74,34.08 29.24,32.58 29.24,31.78 28.61,31.15 27.1,31.15 27.1,29.72 27.66,29.16 29.24,29.16 30.12,30.04 30.12,31.38 31.15,32.42 31.15,33.29 28.85,35.59 27.02,35.59 26.78,35.83 26.78,39.88 22.74,39.88
  pour Top (no thermals): 16.62,35.83 18.53,35.83 18.53,32.18 15.2,32.18 15.2,34.64 16.62,34.64
  pour Top (no thermals): 41.39,29.56 41.39,27.73 38.13,27.73 38.13,30.91 39.56,30.91 39.56,29.56
  pour Top (no thermals): 24.16,37.58 21.23,37.58 21.23,36.31 22.42,36.31 22.5,36.23 22.5,34.24 23.37,34.24 23.69,34.56 24.09,34.56 24.16,34.64
  pour Top (no thermals): 35.52,49.48 34.25,49.48 34.25,45.12 35.44,43.93 35.44,42.34 35.2,42.1 34.72,42.1 33.51,40.88 33.51,39.63 35.2,39.63 35.2,39.24 38.61,39.24 38.61,46.39
5V
  Top 0.5: 22.26,44.88 22.34,44.8 22.89,44.25 29.49,44.25 30.36,45.12 32.5,45.12 33.53,44.09 U3.3
  Top 0.7: C18.1 18,37.18 REG.1
  Top 0.8: C23.1 33.51,41.31 33.51,43.16 U3.3
  Top 1: 18,40.45 22.34,44.8
  Top 1.1: C18.1 18,40.45 | 22.26,44.88 X2.4
  pour Top (no thermals): 17.5,38.29 18.53,38.29 18.53,36.15 16.62,36.15 16.62,37.42 17.5,37.42
5V1
  Top 0.5: 66.71,44.88 66.79,44.8 67.34,44.25 73.94,44.25 74.81,45.12 76.95,45.12 77.98,44.09 U8.3
  Top 0.7: C40.1 62.45,37.18 REG1.1
  Top 0.8: C48.1 77.96,41.31 77.96,43.16 U8.3
  Top 1: 62.45,40.45 66.79,44.8
  Top 1.1: C40.1 62.45,40.45 | 66.71,44.88 X1.4
  pour Top (no thermals): 61.95,38.29 62.98,38.29 62.98,36.15 61.07,36.15 61.07,37.42 61.95,37.42
BOOT0
  Top 0.3: R18.2 31.01,24.4 32.02,24.4 32.9,25.28 NUCLEO_MAIN.BOOT0
BOOT1
  Top 0.3: R37.2 75.46,24.4 76.47,24.4 77.35,25.28 NUCLEO_MAIN1.BOOT0
BSTA  (via drill 0.35)
  Top 0.3: U1.BSTA 23.96,22.78 24.43,22.3 | v24.8,21.93 24.43,22.3 | v15.91,22.81 15.38,22.81 | 15.38,22.81 15.28,22.81 14.66,22.2 14.66,18.02 C1.1 | 24.43,22.3 24.64,21.86 v24.8,21.93 | 24.43,22.3 24.88,22.09 v24.8,21.93 | 15.38,22.81 15.85,22.65 v15.91,22.81 | 15.38,22.81 15.85,22.98 v15.91,22.81
  Bottom 0.3: v15.91,22.81 16.13,22.81 16.38,23.06 | 16.38,23.06 16.92,23.6 19.16,23.6 20.15,22.62 23.41,22.62 24.01,22.02 24.5,22.02 | 24.27,21.94 24.64,21.94 24.64,21.93 v24.8,21.93 | 24.27,21.94 24.74,21.77 v24.8,21.93 | 24.27,21.94 24.5,22.02 | 24.5,22.02 24.74,22.1 v24.8,21.93 | 16.38,23.06 15.88,22.99 v15.91,22.81 | 16.38,23.06 16.04,22.69 v15.91,22.81
BSTA1  (via drill 0.35)
  Top 0.3: U5.BSTA 68.41,22.78 68.88,22.3 | v69.25,21.93 68.88,22.3 | v60.36,22.81 59.84,22.81 | 59.84,22.81 59.73,22.81 59.11,22.2 59.11,18.02 C35.1 | 68.88,22.3 69.09,21.86 v69.25,21.93 | 68.88,22.3 69.33,22.09 v69.25,21.93 | 59.84,22.81 60.3,22.65 v60.36,22.81 | 59.84,22.81 60.3,22.98 v60.36,22.81
  Bottom 0.3: v60.36,22.81 60.58,22.81 60.82,23.06 | 60.82,23.06 61.37,23.6 63.61,23.6 64.6,22.62 67.86,22.62 68.46,22.02 68.96,22.02 | 68.73,21.94 69.09,21.94 69.09,21.93 v69.25,21.93 | 68.73,21.94 69.19,21.77 v69.25,21.93 | 68.73,21.94 68.96,22.02 | 68.96,22.02 69.19,22.1 v69.25,21.93 | 60.82,23.06 60.34,22.99 v60.36,22.81 | 60.82,23.06 60.49,22.69 v60.36,22.81
BSTB  (via drill 0.35)
  Top 0.3: U1.BSTB 21.74,21.03 21.94,20.83 22.22,20.83 | v22.74,20.75 22.66,20.83 22.22,20.83 | C3.1 23.81,16.94 25.86,18.99 | v26.23,19.36 25.86,18.99 | 22.38,20.86 22.7,20.69 v22.74,20.75 | 22.22,20.83 22.38,20.86 | 22.38,20.86 22.7,20.92 v22.74,20.75 | 25.86,18.99 26.3,19.2 v26.23,19.36 | 25.86,18.99 26.07,19.43 v26.23,19.36
  Bottom 0.3: v22.74,20.75 22.93,20.75 23.19,20.49 | v26.23,19.36 25.7,19.36 | 25.7,19.36 24.32,19.36 23.19,20.49 | 23.19,20.49 22.87,20.86 v22.74,20.75 | 23.19,20.49 22.71,20.57 v22.74,20.75 | 25.7,19.36 26.17,19.19 v26.23,19.36 | 25.7,19.36 26.17,19.53 v26.23,19.36
BSTB1  (via drill 0.35)
  Top 0.3: U5.BSTB 66.19,21.03 66.39,20.83 66.67,20.83 | v67.19,20.75 67.11,20.83 66.67,20.83 | C37.1 68.26,16.94 70.31,18.99 | v70.68,19.36 70.31,18.99 | 66.83,20.86 67.15,20.69 v67.19,20.75 | 66.67,20.83 66.83,20.86 | 66.83,20.86 67.15,20.92 v67.19,20.75 | 70.31,18.99 70.75,19.2 v70.68,19.36 | 70.31,18.99 70.52,19.43 v70.68,19.36
  Bottom 0.3: v67.19,20.75 67.38,20.75 67.64,20.49 | v70.68,19.36 70.15,19.36 | 70.15,19.36 68.77,19.36 67.64,20.49 | 67.64,20.49 67.32,20.86 v67.19,20.75 | 67.64,20.49 67.16,20.57 v67.19,20.75 | 70.15,19.36 70.62,19.19 v70.68,19.36 | 70.15,19.36 70.62,19.53 v70.68,19.36
BSTC  (via drill 0.35)
  Top 0.3: U1.BSTC 20.24,21.07 19.32,20.15 19.32,19.48 19.56,19.24 23.05,19.24 25.75,21.94 27.97,21.94 30.99,18.92 31.26,18.92 | 31.26,18.92 v31.78,18.92 | C7.1 32.9,17.48 v33.08,17.61 | 31.26,18.92 31.73,18.76 v31.78,18.92 | 31.26,18.92 31.73,19.09 v31.78,18.92
  Bottom 0.3: 32.14,18.54 31.88,18.8 31.88,18.82 v31.78,18.92 | 32.14,18.54 32.71,17.98 | 32.71,17.98 v33.08,17.61 | 32.14,18.54 31.95,18.99 v31.78,18.92 | 32.14,18.54 31.7,18.77 v31.78,18.92 | 32.71,17.98 32.92,17.53 v33.08,17.61 | 32.71,17.98 33.16,17.77 v33.08,17.61
BSTC1  (via drill 0.35)
  Top 0.3: U5.BSTC 64.69,21.07 63.77,20.15 63.77,19.48 64.01,19.24 67.5,19.24 70.2,21.94 72.43,21.94 75.44,18.92 75.71,18.92 | 75.71,18.92 v76.23,18.92 | C39.1 77.35,17.48 v77.53,17.61 | 75.71,18.92 76.18,18.76 v76.23,18.92 | 75.71,18.92 76.18,19.09 v76.23,18.92
  Bottom 0.3: 76.59,18.54 76.34,18.8 76.34,18.82 v76.23,18.92 | 76.59,18.54 77.16,17.98 | 77.16,17.98 v77.53,17.61 | 76.59,18.54 76.4,18.99 v76.23,18.92 | 76.59,18.54 76.15,18.77 v76.23,18.92 | 77.16,17.98 77.37,17.53 v77.53,17.61 | 77.16,17.98 77.61,17.77 v77.53,17.61
C_U  (via drill 0.35)
  Top 0.3: v34.26,33.46 34.26,32.94 | 34.26,32.94 34.26,31.61 | 34.26,31.61 v34.26,31.08 | v13.61,22.11 13.45,22.11 13.17,21.82 | 13.17,21.82 13.12,21.78 9.96,21.78 6.46,18.29 6.46,13.37 6.7,13.13 6.7,7.02 7.4,6.32 10.65,6.32 11.29,5.68 v11.44,5.68 | v11.44,5.68 11.38,5.52 | v11.44,5.68 11.38,5.85 | 13.17,21.82 13.65,21.93 v13.61,22.11 | 13.17,21.82 13.47,22.21 v13.61,22.11 | 34.26,31.61 34.09,31.14 v34.26,31.08 | 34.26,31.61 34.42,31.14 v34.26,31.08 | 34.26,32.94 34.42,33.4 v34.26,33.46 | 34.26,32.94 34.09,33.4 v34.26,33.46 | v35.68,35.85 35.7,35.85 35.98,35.56 NUCLEO_MAIN.PA0
  Bottom 0.3: U4.1 16.35,6.05 R16.1 15.98,5.68 v11.44,5.68 | v13.61,22.11 15.67,24.16 19.24,24.16 20.31,23.09 23.73,23.09 24.19,22.63 25.22,22.63 25.67,22.18 30.36,22.18 33.77,25.59 33.77,30.59 v34.26,31.08 | v34.26,33.46 34.26,34.28 35.68,35.7 v35.68,35.85 | v11.44,5.68 11.4,5.86 | v11.44,5.68 11.57,5.57
C_U1  (via drill 0.35)
  Top 0.3: v78.71,33.46 78.71,32.94 | 78.71,32.94 78.71,31.61 | 78.71,31.61 v78.71,31.08 | v58.06,22.11 57.9,22.11 57.62,21.82 | 57.62,21.82 57.57,21.78 54.41,21.78 50.91,18.29 50.91,13.37 51.15,13.13 51.15,7.02 51.85,6.32 55.1,6.32 55.74,5.68 v55.88,5.68 | v55.88,5.68 55.82,5.52 | v55.88,5.68 55.82,5.85 | 57.62,21.82 58.1,21.93 v58.06,22.11 | 57.62,21.82 57.92,22.21 v58.06,22.11 | 78.71,31.61 78.54,31.14 v78.71,31.08 | 78.71,31.61 78.87,31.14 v78.71,31.08 | 78.71,32.94 78.87,33.4 v78.71,33.46 | 78.71,32.94 78.54,33.4 v78.71,33.46 | v80.13,35.85 80.15,35.85 80.43,35.56 NUCLEO_MAIN1.PA0
  Bottom 0.3: U7.1 60.8,6.05 R35.1 60.43,5.68 v55.88,5.68 | v58.06,22.11 60.12,24.16 63.69,24.16 64.77,23.09 68.18,23.09 68.64,22.63 69.67,22.63 70.12,22.18 74.81,22.18 78.22,25.59 78.22,30.59 v78.71,31.08 | v78.71,33.46 78.71,34.28 80.13,35.7 v80.13,35.85 | v55.88,5.68 55.85,5.86 | v55.88,5.68 56.02,5.57
C_W  (via drill 0.35)
  Top 0.3: v35.13,31.16 35.12,31.17 35.12,31.69 | v35.12,33.46 35.12,32.94 | 35.12,32.94 35.12,31.69 | 35.12,32.94 35.28,33.4 v35.12,33.46 | 35.12,32.94 34.95,33.4 v35.12,33.46 | 35.12,31.69 34.96,31.22 v35.13,31.16 | 35.12,31.69 35.3,31.23 v35.13,31.16 | NUCLEO_MAIN.PA1 37.1,36.02 38.42,36.02 v38.69,35.75
  Bottom 0.3: U4.7 24.83,6.86 R8.1 25.91,6.01 26.93,7.03 28.61,7.03 29.36,7.78 31.02,7.78 33.91,10.67 33.91,16.22 34.88,17.2 34.88,20.91 33.92,21.87 33.92,24.55 34.64,25.27 34.64,30.3 35.13,30.79 v35.13,31.16 | v35.12,33.46 35.49,33.83 | 35.49,33.83 35.49,33.84 35.71,34.06 37.41,35.75 v38.69,35.75 | 35.49,33.83 35.04,33.62 v35.12,33.46 | 35.49,33.83 35.28,33.39 v35.12,33.46
C_W1  (via drill 0.35)
  Top 0.3: v79.58,31.16 79.57,31.17 79.57,31.69 | v79.57,33.46 79.57,32.94 | 79.57,32.94 79.57,31.69 | 79.57,32.94 79.73,33.4 v79.57,33.46 | 79.57,32.94 79.4,33.4 v79.57,33.46 | 79.57,31.69 79.41,31.22 v79.58,31.16 | 79.57,31.69 79.75,31.23 v79.58,31.16 | NUCLEO_MAIN1.PA1 81.55,36.02 82.88,36.02 v83.14,35.75
  Bottom 0.3: U7.7 69.28,6.86 R30.1 70.36,6.01 71.38,7.03 73.06,7.03 73.81,7.78 75.47,7.78 78.36,10.67 78.36,16.22 79.33,17.2 79.33,20.91 78.37,21.87 78.37,24.55 79.09,25.27 79.09,30.3 79.58,30.79 v79.58,31.16 | v79.57,33.46 79.94,33.83 | 79.94,33.83 79.94,33.84 80.16,34.06 81.86,35.75 v83.14,35.75 | 79.94,33.83 79.49,33.62 v79.57,33.46 | 79.94,33.83 79.73,33.39 v79.57,33.46
CANH  (via drill 0.5)
  Bottom 0.8: U3.7 31.73,49.01 26.47,49.01 24.8,47.34 X2.5
  other vias: 32.26,48.48
CANH1  (via drill 0.5)
  Bottom 0.8: U8.7 76.18,49.01 70.92,49.01 69.25,47.34 X1.5
  other vias: 76.71,48.48
CANL  (via drill 0.5)
  Top 0.8: U3.6 v33.53,47.34
  Bottom 0.8: v33.53,47.34 33.38,47.18 28.06,47.18 X2.6
CANL1  (via drill 0.5)
  Top 0.8: U8.6 v77.98,47.34
  Bottom 0.8: v77.98,47.34 77.83,47.18 72.51,47.18 X1.6
CANRX  (via drill 0.3, 0.35)
  Top 0.3: NUCLEO_MAIN.PB9 33.9,28.16 33.21,28.84 v33.05,28.84
  Top 0.5: v32.9,30.91 32.9,32.87 v33.36,33.34
  Top 0.6: U3.4 v34.8,43.77
  Bottom 0.5: v34.8,43.77 36.35,42.22 36.35,39.56 33.36,36.58 v33.36,33.34 | v33.05,28.84 32.9,29 v32.9,30.91
CANRX1  (via drill 0.3, 0.35)
  Top 0.3: NUCLEO_MAIN1.PB9 78.35,28.16 77.66,28.84 v77.51,28.84
  Top 0.5: v77.35,30.91 77.35,32.87 v77.81,33.34
  Top 0.6: U8.4 v79.25,43.77
  Bottom 0.5: v79.25,43.77 80.8,42.22 80.8,39.56 77.81,36.58 v77.81,33.34 | v77.51,28.84 77.35,29 v77.35,30.91
CANTX  (via drill 0.3)
  Top 0.3: NUCLEO_MAIN.PB8 33.4,27.86 33.31,27.96 32.34,28.53 32.18,28.53 | v32.08,28.53 32.26,28.53 32.38,28.41 | 30.99,43.71 v30.99,44.16 30.85,44.11 30.99,43.71 | 30.99,43.71 U3.1 | 32.38,28.41 32.3,28.61 v32.08,28.53 | 32.38,28.41 32.18,28.53 | 32.18,28.53 32.11,28.57 v32.08,28.53 | 30.99,43.71 31.14,44.11
  Top 0.5: v32.02,33.29 32.02,30.97 v32.08,30.91
  Bottom 0.5: v30.99,44.16 33.21,44.16 35.52,41.86 35.52,39.94 32.71,37.14 32.71,33.98 v32.02,33.29 | v32.08,30.91 v32.08,28.53
CANTX1  (via drill 0.3)
  Top 0.3: NUCLEO_MAIN1.PB8 77.85,27.86 77.76,27.96 76.79,28.53 76.63,28.53 | v76.53,28.53 76.71,28.53 76.83,28.41 | 75.44,43.71 v75.44,44.16 75.3,44.11 75.44,43.71 | 75.44,43.71 U8.1 | 76.83,28.41 76.76,28.61 v76.53,28.53 | 76.83,28.41 76.63,28.53 | 76.63,28.53 76.56,28.57 v76.53,28.53 | 75.44,43.71 75.59,44.11
  Top 0.5: v76.47,33.29 76.47,30.97 v76.53,30.91
  Bottom 0.5: v75.44,44.16 77.66,44.16 79.97,41.86 79.97,39.94 77.16,37.14 77.16,33.98 v76.47,33.29 | v76.53,30.91 v76.53,28.53
CLK  (via drill 0.35)
  Top 0.3: v28.69,32.02 28.69,32.08 29.03,32.42 | 29.03,32.42 30.84,34.23 30.84,35.52 31.3,35.98 31.87,35.98 32.9,37.01 NUCLEO_MAIN.PA5 | 29.03,32.42 28.6,32.17 v28.69,32.02 | 29.03,32.42 28.86,31.96 v28.69,32.02
  Bottom 0.3: U2.2 18.19,27.04 19.35,27.04 20.76,28.45 21.94,28.45 22.78,29.28 22.78,30.55 23.85,31.62 28.29,31.62 28.32,31.65 | v28.69,32.02 28.32,31.65 | 28.32,31.65 28.76,31.86 v28.69,32.02 | 28.32,31.65 28.53,32.1 v28.69,32.02
CLK1  (via drill 0.35)
  Top 0.3: v73.14,32.02 73.14,32.08 73.48,32.42 | 73.48,32.42 75.29,34.23 75.29,35.52 75.75,35.98 76.32,35.98 77.35,37.01 NUCLEO_MAIN1.PA5 | 73.48,32.42 73.05,32.17 v73.14,32.02 | 73.48,32.42 73.31,31.96 v73.14,32.02
  Bottom 0.3: U6.2 62.64,27.04 63.8,27.04 65.21,28.45 66.39,28.45 67.23,29.28 67.23,30.55 68.3,31.62 72.74,31.62 72.77,31.65 | v73.14,32.02 72.77,31.65 | 72.77,31.65 73.22,31.86 v73.14,32.02 | 72.77,31.65 72.98,32.1 v73.14,32.02
CS  (via drill 0.5)
  Top 0.3: NUCLEO_MAIN.PB6 31.9,26.01 | 31.9,26.01 31.9,25.39 v31.78,25.27 | 31.9,26.01 31.56,25.39 v31.78,25.27 | 31.9,26.01 32.03,25.32 v31.78,25.27
  Bottom 0.3: U2.1 18.2,26.38 20.59,26.38 22.42,24.56 24.16,24.56 24.72,24 30.51,24 31.25,24.74 | 31.25,24.74 v31.78,25.27 | 31.25,24.74 31.89,25.05 v31.78,25.27 | 31.25,24.74 31.56,25.38 v31.78,25.27
CS1  (via drill 0.5)
  Top 0.3: NUCLEO_MAIN1.PB6 76.35,26.01 | 76.35,26.01 76.35,25.39 v76.23,25.27 | 76.35,26.01 76.01,25.39 v76.23,25.27 | 76.35,26.01 76.48,25.32 v76.23,25.27
  Bottom 0.3: U6.1 62.65,26.38 65.04,26.38 66.87,24.56 68.62,24.56 69.17,24 74.97,24 75.71,24.74 | 75.71,24.74 v76.23,25.27 | 75.71,24.74 76.34,25.05 v76.23,25.27 | 75.71,24.74 76.01,25.38 v76.23,25.27
DT
  Top 0.3: R7.2 27.3,23.28 U1.DT
DT1
  Top 0.3: R25.2 71.75,23.28 U5.DT
GHA  (via drill 0.35)
  Top 0.3: R1.1 15.28,15.25 15.28,21.42 | v15.35,21.94 15.28,21.86 15.28,21.42 | v24.16,21.3 24.09,21.3 23.76,21.63 | 23.76,21.63 23.11,22.28 U1.GHA | 15.28,21.42 15.51,21.86 v15.35,21.94 | 15.28,21.42 15.18,21.91 v15.35,21.94 | 23.76,21.63 24.01,21.21 v24.16,21.3 | 23.76,21.63 24.22,21.47 v24.16,21.3
  Bottom 0.3: v24.16,21.3 23.93,21.3 23.69,21.54 | 23.69,21.54 23.09,22.14 19.92,22.14 19.01,23.05 17.1,23.05 15.99,21.94 15.88,21.94 | 15.88,21.94 v15.35,21.94 | 15.88,21.94 15.41,22.11 v15.35,21.94 | 15.88,21.94 15.41,21.77 v15.35,21.94 | 23.69,21.54 24.04,21.18 v24.16,21.3 | 23.69,21.54 24.18,21.48 v24.16,21.3
GHA1  (via drill 0.35)
  Top 0.3: R22.1 59.73,15.25 59.73,21.42 | v59.8,21.94 59.73,21.86 59.73,21.42 | v68.62,21.3 68.54,21.3 68.21,21.63 | 68.21,21.63 67.56,22.28 U5.GHA | 59.73,21.42 59.96,21.86 v59.8,21.94 | 59.73,21.42 59.63,21.91 v59.8,21.94 | 68.21,21.63 68.46,21.21 v68.62,21.3 | 68.21,21.63 68.67,21.47 v68.62,21.3
  Bottom 0.3: v68.62,21.3 68.38,21.3 68.14,21.54 | 68.14,21.54 67.54,22.14 64.37,22.14 63.46,23.05 61.55,23.05 60.44,21.94 60.33,21.94 | 60.33,21.94 v59.8,21.94 | 60.33,21.94 59.86,22.11 v59.8,21.94 | 60.33,21.94 59.86,21.77 v59.8,21.94 | 68.14,21.54 68.49,21.18 v68.62,21.3 | 68.14,21.54 68.64,21.48 v68.62,21.3
GHB  (via drill 0.35)
  Top 0.3: U1.GHB 21.24,20.8 | 21.24,20.8 21.24,20.28 v21.23,20.27 | v27,19.76 27,19.23 | 27,19.23 27,19.14 24.16,16.31 R3.1 | 21.28,20.69 21.13,20.31 v21.23,20.27 | 21.24,20.8 21.28,20.69 | 21.28,20.69 21.4,20.33 v21.23,20.27 | 27,19.23 27.17,19.7 v27,19.76 | 27,19.23 26.83,19.7 v27,19.76
  Bottom 0.3: v21.23,20.27 21.23,20.43 21.51,20.71 | 21.51,20.71 22.18,21.38 23.07,21.38 24.3,20.15 26.6,20.15 26.63,20.13 | v27,19.76 26.63,20.13 | 21.51,20.71 21.12,20.41 v21.23,20.27 | 21.51,20.71 21.4,20.23 v21.23,20.27 | 26.63,20.13 26.84,19.68 v27,19.76 | 26.63,20.13 27.08,19.92 v27,19.76
GHB1  (via drill 0.35)
  Top 0.3: U5.GHB 65.69,20.8 | 65.69,20.8 65.69,20.28 v65.68,20.27 | v71.45,19.76 71.45,19.23 | 71.45,19.23 71.45,19.14 68.62,16.31 R42.1 | 65.73,20.69 65.58,20.31 v65.68,20.27 | 65.69,20.8 65.73,20.69 | 65.73,20.69 65.85,20.33 v65.68,20.27 | 71.45,19.23 71.62,19.7 v71.45,19.76 | 71.45,19.23 71.28,19.7 v71.45,19.76
  Bottom 0.3: v65.68,20.27 65.68,20.43 65.96,20.71 | 65.96,20.71 66.63,21.38 67.52,21.38 68.75,20.15 71.05,20.15 71.08,20.13 | v71.45,19.76 71.08,20.13 | 65.96,20.71 65.57,20.41 v65.68,20.27 | 65.96,20.71 65.85,20.23 v65.68,20.27 | 71.08,20.13 71.29,19.68 v71.45,19.76 | 71.08,20.13 71.53,19.92 v71.45,19.76
GHC
  Top 0.3: U1.GHC 19.61,21.59 18.77,20.75 18.77,19.16 19.16,18.76 23.29,18.76 25.99,21.46 27.74,21.46 30.91,18.29 33.53,18.29 33.77,18.05 33.77,14.77 R5.1
GHC1
  Top 0.3: U5.GHC 64.06,21.59 63.22,20.75 63.22,19.16 63.61,18.76 67.74,18.76 70.44,21.46 72.19,21.46 75.36,18.29 77.98,18.29 78.22,18.05 78.22,14.77 R44.1
GLA  (via drill 0.35)
  Top 0.3: U1.GLA 18.53,22.78 18.48,22.73 | 18.48,22.73 v18.11,22.36 | v10.59,20.19 10.07,20.19 | 10.07,20.19 9.96,20.19 7.73,17.97 7.73,15.09 R2.1 | 18.48,22.73 18.33,22.66 | 18.33,22.66 18.04,22.52 v18.11,22.36 | 18.33,22.66 18.17,22.33 v18.11,22.36 | 10.07,20.19 10.53,20.03 v10.59,20.19 | 10.07,20.19 10.53,20.36 v10.59,20.19
  Bottom 0.3: v18.11,22.36 17.58,22.36 | 17.58,22.36 17.12,22.36 16.07,21.3 11.7,21.3 10.96,20.56 | v10.59,20.19 10.96,20.56 | 17.58,22.36 18.05,22.19 v18.11,22.36 | 17.58,22.36 18.05,22.52 v18.11,22.36 | 10.96,20.56 10.52,20.35 v10.59,20.19 | 10.96,20.56 10.75,20.12 v10.59,20.19
GLA1  (via drill 0.35)
  Top 0.3: U5.GLA 62.98,22.78 62.93,22.73 | 62.93,22.73 v62.56,22.36 | v55.04,20.19 54.52,20.19 | 54.52,20.19 54.41,20.19 52.18,17.97 52.18,15.09 R24.1 | 62.93,22.73 62.78,22.66 | 62.78,22.66 62.48,22.52 v62.56,22.36 | 62.78,22.66 62.62,22.33 v62.56,22.36 | 54.52,20.19 54.98,20.03 v55.04,20.19 | 54.52,20.19 54.98,20.36 v55.04,20.19
  Bottom 0.3: v62.56,22.36 62.03,22.36 | 62.03,22.36 61.57,22.36 60.52,21.3 56.15,21.3 55.41,20.56 | v55.04,20.19 55.41,20.56 | 62.03,22.36 62.5,22.19 v62.56,22.36 | 62.03,22.36 62.5,22.52 v62.56,22.36 | 55.41,20.56 54.97,20.35 v55.04,20.19 | 55.41,20.56 55.2,20.12 v55.04,20.19
GLB  (via drill 0.35)
  Top 0.3: U1.GLB 18.14,23.28 17.41,22.55 17.41,22.2 | 17.41,22.2 v17.41,21.68 | v15.91,20.51 16.07,20.35 16.07,20.01 | 16.07,20.01 16.07,16.6 16.86,15.81 R4.1 | 17.41,22.2 17.25,21.74 v17.41,21.68 | 17.41,22.2 17.58,21.74 v17.41,21.68 | 16.07,20.01 16.09,20.5 v15.91,20.51 | 16.07,20.01 15.77,20.4 v15.91,20.51
  Bottom 0.3: v15.91,20.51 16.09,20.51 16.36,20.78 | v17.41,21.68 17.25,21.68 16.97,21.39 | 16.97,21.39 16.36,20.78 | 16.97,21.39 17.45,21.51 v17.41,21.68 | 16.97,21.39 17.27,21.79 v17.41,21.68 | 16.36,20.78 15.88,20.68 v15.91,20.51 | 16.36,20.78 16.05,20.4 v15.91,20.51
GLB1  (via drill 0.35)
  Top 0.3: U5.GLB 62.59,23.28 61.86,22.55 61.86,22.2 | 61.86,22.2 v61.86,21.68 | v60.36,20.51 60.52,20.35 60.52,20.01 | 60.52,20.01 60.52,16.6 61.31,15.81 R43.1 | 61.86,22.2 61.7,21.74 v61.86,21.68 | 61.86,22.2 62.03,21.74 v61.86,21.68 | 60.52,20.01 60.54,20.5 v60.36,20.51 | 60.52,20.01 60.22,20.4 v60.36,20.51
  Bottom 0.3: v60.36,20.51 60.54,20.51 60.81,20.78 | v61.86,21.68 61.7,21.68 61.42,21.39 | 61.42,21.39 60.81,20.78 | 61.42,21.39 61.9,21.51 v61.86,21.68 | 61.42,21.39 61.72,21.79 v61.86,21.68 | 60.81,20.78 60.32,20.68 v60.36,20.51 | 60.81,20.78 60.5,20.4 v60.36,20.51
GLC
  Top 0.3: U1.GLC 17.75,23.78 16.7,22.73 16.7,21.46 17.66,20.51 17.66,18.45 18.3,17.81 23.71,17.81 26.29,20.39 27.31,20.39 27.65,20.04 27.65,19.08 25.99,17.41 R6.1
GLC1
  Top 0.3: U5.GLC 62.2,23.78 61.15,22.73 61.15,21.46 62.11,20.51 62.11,18.45 62.75,17.81 68.16,17.81 70.73,20.39 71.76,20.39 72.1,20.04 72.1,19.08 70.44,17.41 R45.1
GND  (via drill 0.3, 0.35, 0.5)
  Top 0.3: 19.95,24.57 19.79,24.73 19.79,25.02 19.74,25.07 U1.GND 18.21,25.46 | 19.95,24.57 20.56,23.96 | 20.56,23.96 U1.PAD 21.07,23.61 | C4.2 17.98,25.46 18.21,25.46 | NUCLEO_MAIN.VSS 34.4,37.47 33.96,37.03 33.96,34.58 34.45,34.09 35.38,34.09 35.49,33.98 35.63,33.98 36.25,34.6 37.02,34.6 NUCLEO_MAIN.VREF- | U$2.1 40.64,25.77 40.64,24.83 D6.C 39.6,24.64 38.98,24.03 38.83,24.19 | 38.83,24.19 S1.4 | NUCLEO_MAIN.VSS3 34.4,25.91 | 34.4,25.91 34.4,25.9 33.32,24.82 C11.2 | 34.4,25.91 35.11,25.19 37.82,25.19 38.83,24.19 | v19.75,38.66 C18.2 | 19.86,36.15 REG.3 | C14.2 23.35,39.22 24.48,40.35 27.26,40.35 27.9,39.72 NUCLEO_MAIN.VSS1 27.9,37.1 v27.58,36.78 | C10.2 20.25,33.53 23.66,30.12 23.66,29.56 | 23.66,29.56 NUCLEO_MAIN.VSS2 | C15.2 24.76,26.17 | 24.76,26.17 24.06,26.17 23.66,26.57 23.66,29.56 | 21.07,23.61 21.31,23.84 v21.31,24 | U3.2 32.4,43.25 32.26,43.25 | 24.76,26.17 25.19,25.93 v25.28,26.09 25.24,26.26 24.76,26.17 | 20.56,23.96 21.24,23.76 v21.31,24 | 20.56,23.96 21.21,24.23 v21.31,24 | 19.95,24.57 20.2,23.91 v20.43,24 | 19.95,24.57 20.56,24.22 v20.43,24 | 21.07,23.61 20.63,24.16 v20.43,24 | 21.07,23.61 20.38,23.76 v20.43,24 | 18.21,25.46 17.52,25.3 C4.2 | 18.21,25.46 17.78,24.9 C4.2
  Top 0.5: 32.26,43.25 U3.2 | U3.8 29.01,46.5 v29.01,46.2 | v32.26,41.91 31.49,41.14 C23.2
  Top 0.6: v32.26,41.91 32.26,43.11 | 40.64,25.77 41,26.36 U$2.1 40.29,26.36 40.64,25.77
  Top 0.8: C23.2 31.49,40.33 v31.22,40.06
  Top 1: D3.C 15.67,39.4 v15.83,39.56 | v19.75,38.66 C12.2 21.74,38.7 C14.2 | C18.2 19.86,38.44 19.86,36.15 | REG.3 19.86,33.69 C10.2 | v34.96,15.67 34.96,18.13 33.93,19.16 v33.05,19.16 | C15.2 25.35,26.09 26.32,26.09 27.58,24.83 R7.1 28.08,24.69 28.77,24 v28.77,23.13 28.77,22.57 29.48,21.86 30.67,21.86 31.76,22.95 R18.1 C11.2 | X2.3 20.44,47.19 20.44,48.5
  Bottom 0.3: R9.1 18.23,8.55 U4.4 | U2.13 24.3,27.07 24.9,26.46 | 24.9,26.46 v25.28,26.09 | v9.48,15.43 9.64,15.55 9.69,15.35 | 9.69,15.35 9.79,15 | 9.79,15 9.82,14.88 | 9.82,14.88 C5.1 | v28.21,15.27 28.19,15.41 28.47,14.82 | 28.47,14.82 C6.1 | C21.1 4.9,21 5.04,20.91 | C20.1 4.9,24 4.99,24 | 4.99,24 5.04,24 | 4.95,27.07 4.9,27.25 5.04,27.25 | 4.95,27.07 C19.1 | C13.1 4.9,33.25 5.04,33.25 | C22.1 4.9,36.5 5.04,36.5 | 9.79,15 9.65,15.48 v9.48,15.43 | 9.79,15 9.38,15.28 v9.48,15.43 | 9.69,15.35 9.87,14.89 v10.04,14.95 10.12,15.11 9.69,15.35 | 9.82,14.88 9.39,14.63 v9.48,14.48 9.65,14.41 9.82,14.88 | 28.47,14.82 28.39,15.3 v28.21,15.27 | 28.47,14.82 28.1,15.14 v28.21,15.27 | 4.95,27.07 4.81,27.55 v4.64,27.5 4.54,27.35 4.95,27.07 | 24.9,26.46 25.12,26.01 v25.28,26.09 | 24.9,26.46 25.35,26.25 v25.28,26.09 | 4.99,24 5.45,23.84 5.51,24 5.45,24.17 4.99,24 | v27.9,15.83 28.07,15.87 28.2,15.4 27.79,15.68 v27.9,15.83 | v27.9,15.83 28.07,15.88 28.2,15.4 27.79,15.68 v27.9,15.83 | v28.69,15.83 28.69,18.13 28.37,18.45 | 28.29,15.21 28.54,14.79 v28.69,14.88 28.75,15.04 28.29,15.21 | 28.4,14.97 28.08,14.59 v28.21,14.48 28.39,14.47 28.4,14.97 | 4.96,27.04 4.54,26.77 v4.64,26.62 4.81,26.57 4.96,27.04
  Bottom 0.5: v29.01,46.2 29.01,44.85
  Bottom 0.6: 34.98,9.74 28.45,3.21 25.07,3.21 23.88,4.4 C34.2
  Bottom 0.7: D2.C D1.C 11.54,48.66 19.27,48.66 19.72,48.21 X2.3 | v28.77,23.13 28.61,23.29 24.48,23.29 24.01,23.77 21.78,23.77 21.55,24 v21.31,24 v20.43,24 19.38,25.06 C4.2
  Bottom 1: C34.2 R17.1 21.84,6.64 19.84,8.65 18.41,8.65 18.41,9.85 R9.1 | v15.83,39.56 18.86,39.56 v19.75,38.66 | v34.96,15.67 34.98,15.65 34.98,9.74 | C2.1 19.23,17.27 19.16,17.34 | 9.79,17.57 9.79,14.8 C5.1
  Bottom 1.5: X2.3 19.72,43.45 v15.83,39.56 14.08,37.81 6.31,37.81 5.04,36.54 5.04,36.5 5.04,33.25 5.04,27.25 5.04,24 5.04,21.23 | 5.04,21.23 5.04,20.91 | 5.04,21.23 8.69,17.57 9.79,17.57
  other vias: 10.04,14 28.69,14 18.69,15.27 19.4,14.64 18.69,14.64 19.4,14 4.58,35.54 4.64,29.24 4.64,28.37 17.58,25.06 31.71,34.96 4.64,25.75 4.64,24.88 4.64,31.07 4.64,24 4.64,30.19 8.85,15.91 10.04,15.91 17.97,15.91 18.69,15.91 19.4,15.27 27.18,15.83 17.97,15.27 17.97,14.64 17.97,14 18.69,14 19.4,15.91 20.43,39.8 19.72,39.8 19.01,39.8 20.43,40.51 19.72,40.51 20.43,41.23 19.16,37.58 32.04,40.04 30.42,40.06 31.55,34.24 8.93,23.84 7.58,23.84 7.26,20.11 31.07,20.03 31.94,20.03 32.58,19.72 15.83,40.35 16.62,40.35 16.62,39.64 16.62,38.85 15.83,38.85 15.04,39.56 15.04,38.85 16.62,41.07 18.05,42.26 18.69,42.81 19.32,43.45 19.96,44.24 15.83,38.13 16.62,38.13 23.29,43.05 25.99,43.05 28.37,42.42 26.07,40.51 23.29,40.51 21.62,39.8 10.02,38.13 9.99,33.05 10.02,29.69 11.46,29.64 13.43,31.23 14.4,32.8 14.48,35.59 10.02,36.31 12.74,22.89 14.24,24.4 16.47,24.96 16.36,29.61 17.76,31.54 4.8,37.16 5.43,37.81 4.72,19.48 4.64,21.38 5.75,18.45 9.16,22.02 7.02,21.86 41.07,25.19 39.8,22.97 36.31,22.97 37.9,22.97 37.9,20.19 40.44,18.61 37.58,15.91 39.09,25.59 4.71,33.73 5.41,31.82 29.04,45.31 30.77,41.83 29.28,43.32
  pour Top (no thermals): 8.45,16.7 10.43,16.7 10.43,13.68 8.45,13.68
  pour Top (no thermals): 17.58,16.54 19.8,16.54 19.8,13.68 17.58,13.68
  pour Top (no thermals): 26.7,16.62 29.09,16.62 29.09,13.68 26.7,13.68
  pour Top (no thermals): 19.32,25.75 19.88,25.75 19.88,25.11 18.37,25.11 18.37,24.56 18.13,24.32 17.34,24.32 5.75,12.73 -1.97,12.73 -1.97,44.4 5.91,44.4 5.91,26.15 6.46,25.59 19.16,25.59
  pour Bottom (no thermals): 18.69,49.09 18.69,43.93 13.37,38.61 5.83,38.61 4.4,37.18 4.4,19.24 10.59,13.05 10.59,19.4 9.32,20.67 9.32,27.02 21.15,38.85 21.15,49.09
  pour Bottom (no thermals): 9.08,17.57 9.08,14.4 10.59,12.89 11.46,12.89 11.46,17.57
  pour Bottom (no thermals): 16.47,17.1 16.47,13.68 20.83,13.68 20.83,17.1
  pour Bottom (no thermals): 25.43,18.13 25.43,12.73 29.4,12.73 29.4,18.13
  pour Bottom (no thermals): 8.61,19.64 23.61,19.64 24.48,18.76 29.4,18.76 29.4,16.62 8.61,16.62
  pour Top (no thermals): 18.85,30.75 18.85,40.2 22.33,43.68 32.41,43.68 32.41,39.56 24.48,39.56 24.16,39.24 24.16,37.89 20.83,37.89 20.83,35.99 22.18,35.99 22.18,32.89 24.24,30.83 24.24,27.02 26.15,27.02 26.15,25.67 24.24,25.67 23.53,26.38 23.53,28.53 21.62,30.43 19.16,30.43
  pour Bottom (no thermals): 27.1,38.69 27.1,36.23 27.42,35.91 28.93,35.91 31.15,33.69 31.78,33.69 32.18,34.08 32.18,36.62 33.77,38.21 33.77,40.91 32.5,42.18 30.59,42.18
  pour Top (no thermals): 34.28,38.88 31.23,35.83 31.23,33.84 34.28,33.84
  pour Top (no thermals): 27.97,37.5 28.05,37.5 28.05,36.39 27.66,35.99 26.55,37.1 27.58,37.1
  pour Top (no thermals): 33.29,25.91 34.48,25.91 34.72,25.67 38.53,25.67 38.69,25.83 38.69,27.42 41.71,27.42 41.71,15.51 35.91,15.51 35.91,24.16 34.17,24.16 34.17,18.76 32.42,18.76 31.78,19.4 31.15,19.4 28.29,22.26 28.29,23.53 29.24,23.53 29.24,22.73 30.75,22.73 31.07,23.05 31.07,23.84 32.02,23.84 33.29,25.11
  pour Top (no thermals): 26.23,25.91 29.09,25.91 29.09,23.92 26.78,23.92 26.78,24.96 26.23,25.51